# Altium PCB PCB1.PcbDoc (part 1 of 2)
Units mil, origin at the board's own origin, x right, y up, seen from the top; angles counter-clockwise.
Board outline 5600 x 3600 mil, 4 copper layers (Top Layer (GND), Layer 1 (Supplies), Layer 2 (GNDs), Bottom Layer (5VA)), stack 23.756 mil thick; 77 components, 77 nets, 439 pads, 79 vias.
Unrouted connection lines stored in the file: 2.
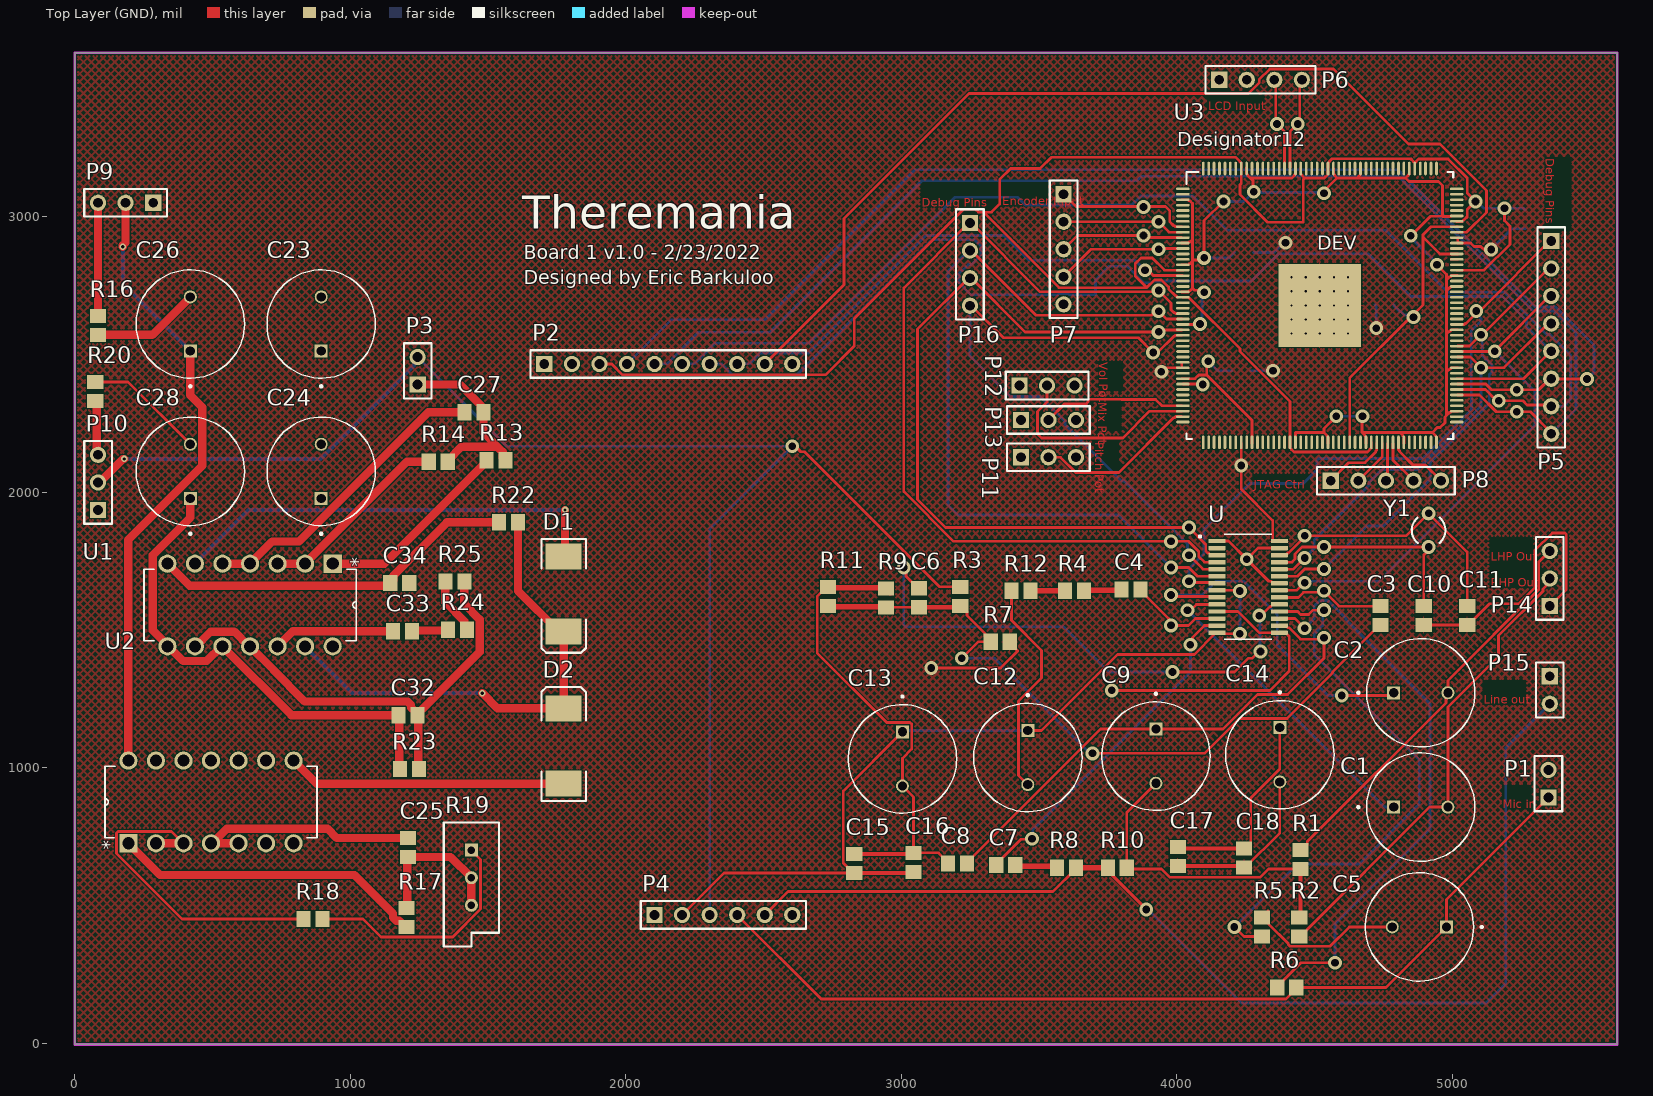
[diagram p0: Top Layer (GND) view]
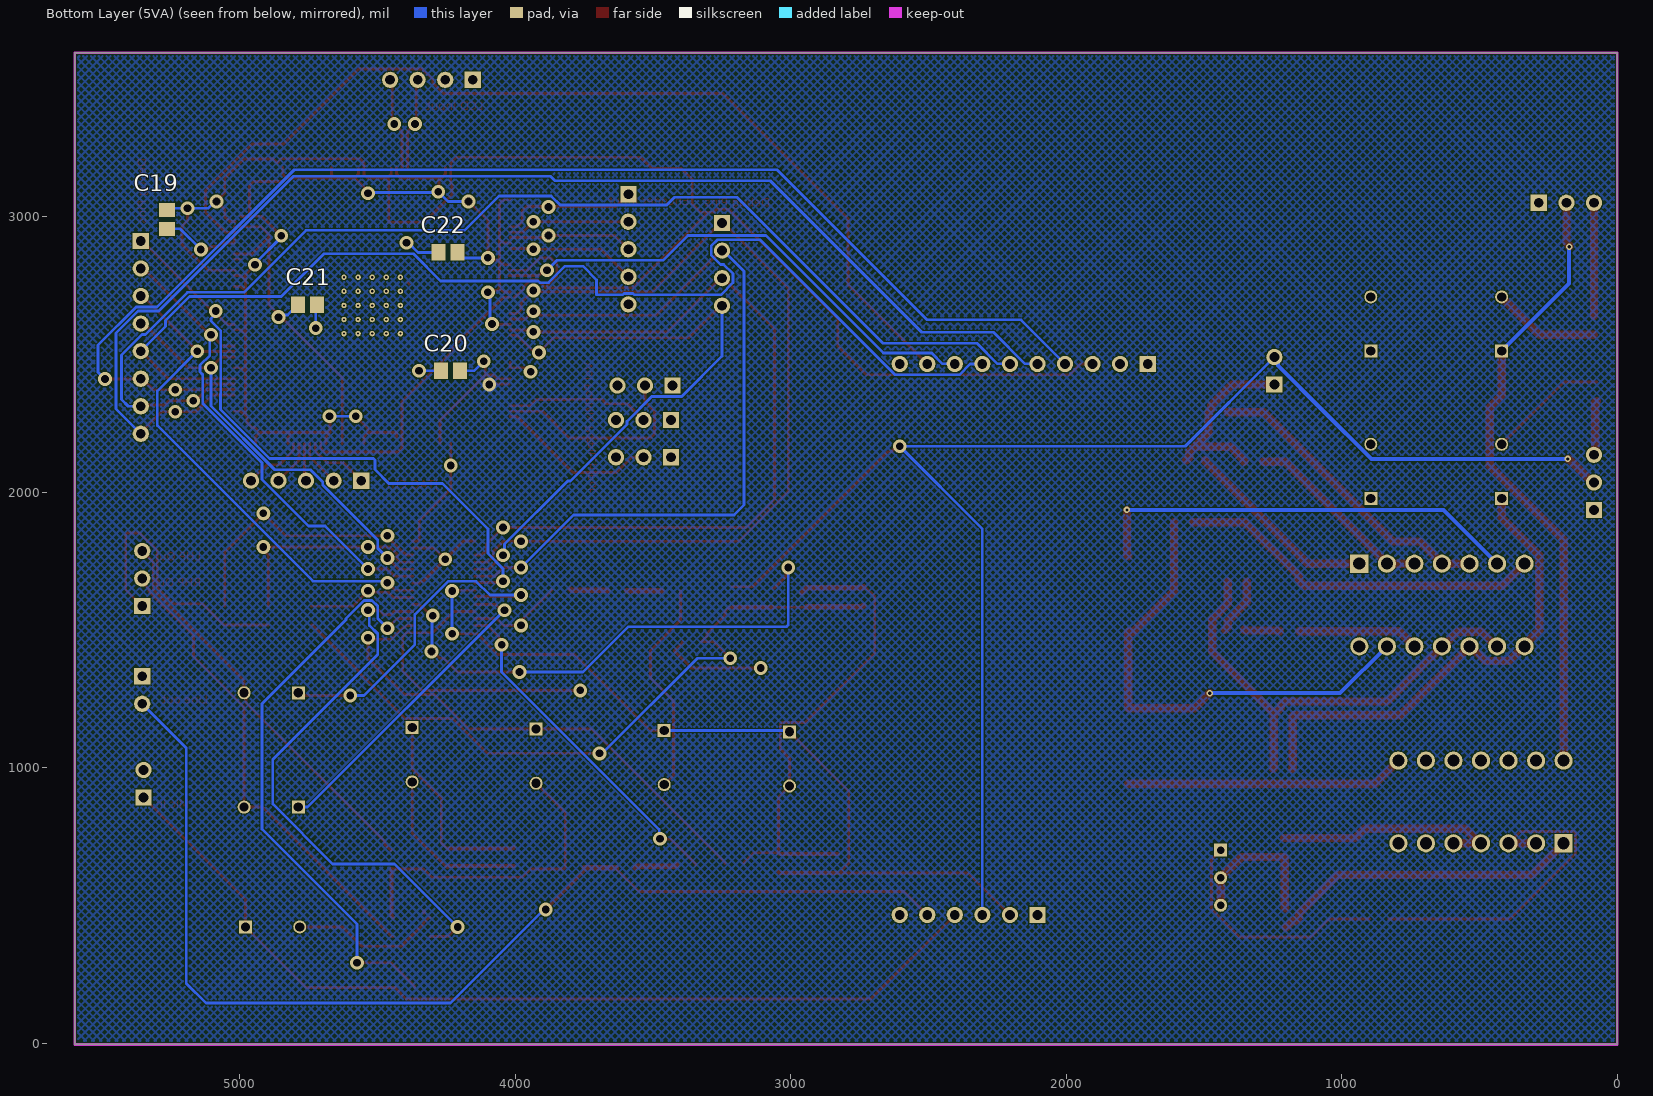
[diagram p1: Bottom Layer (5VA) view, seen from below]
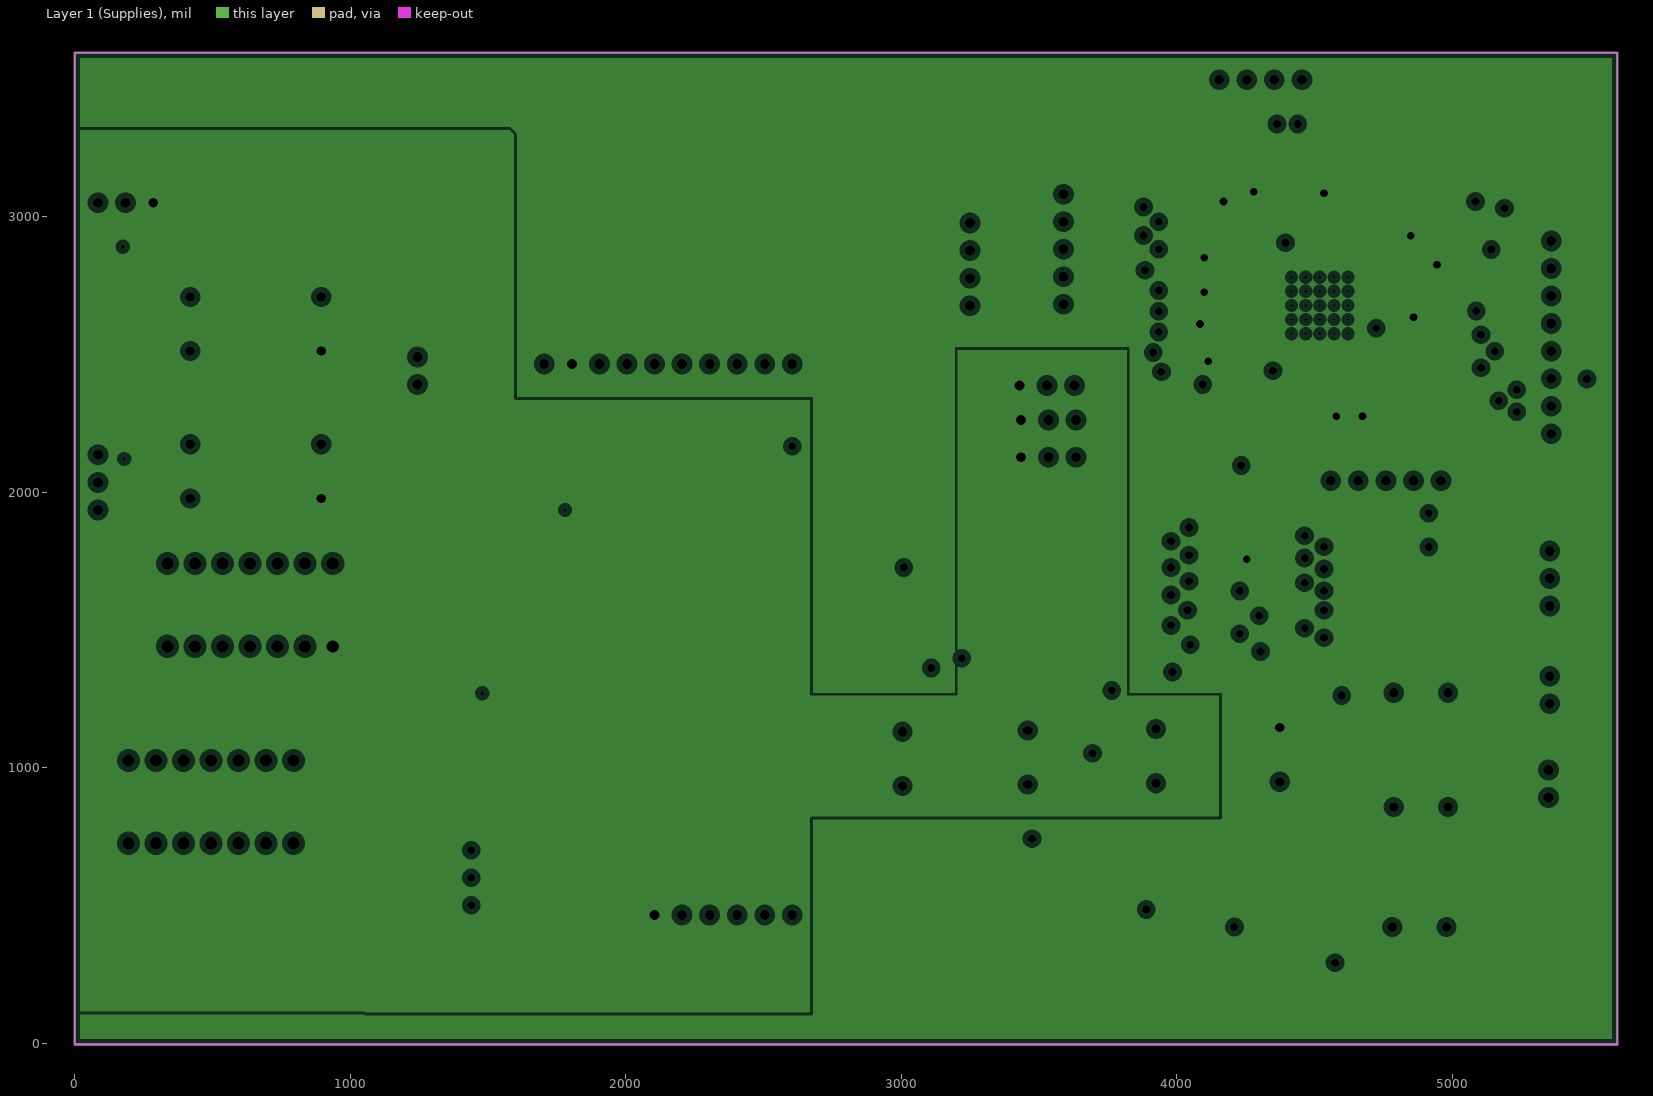
[diagram p2: Layer 1 (Supplies), clearances drawn from the general rule]
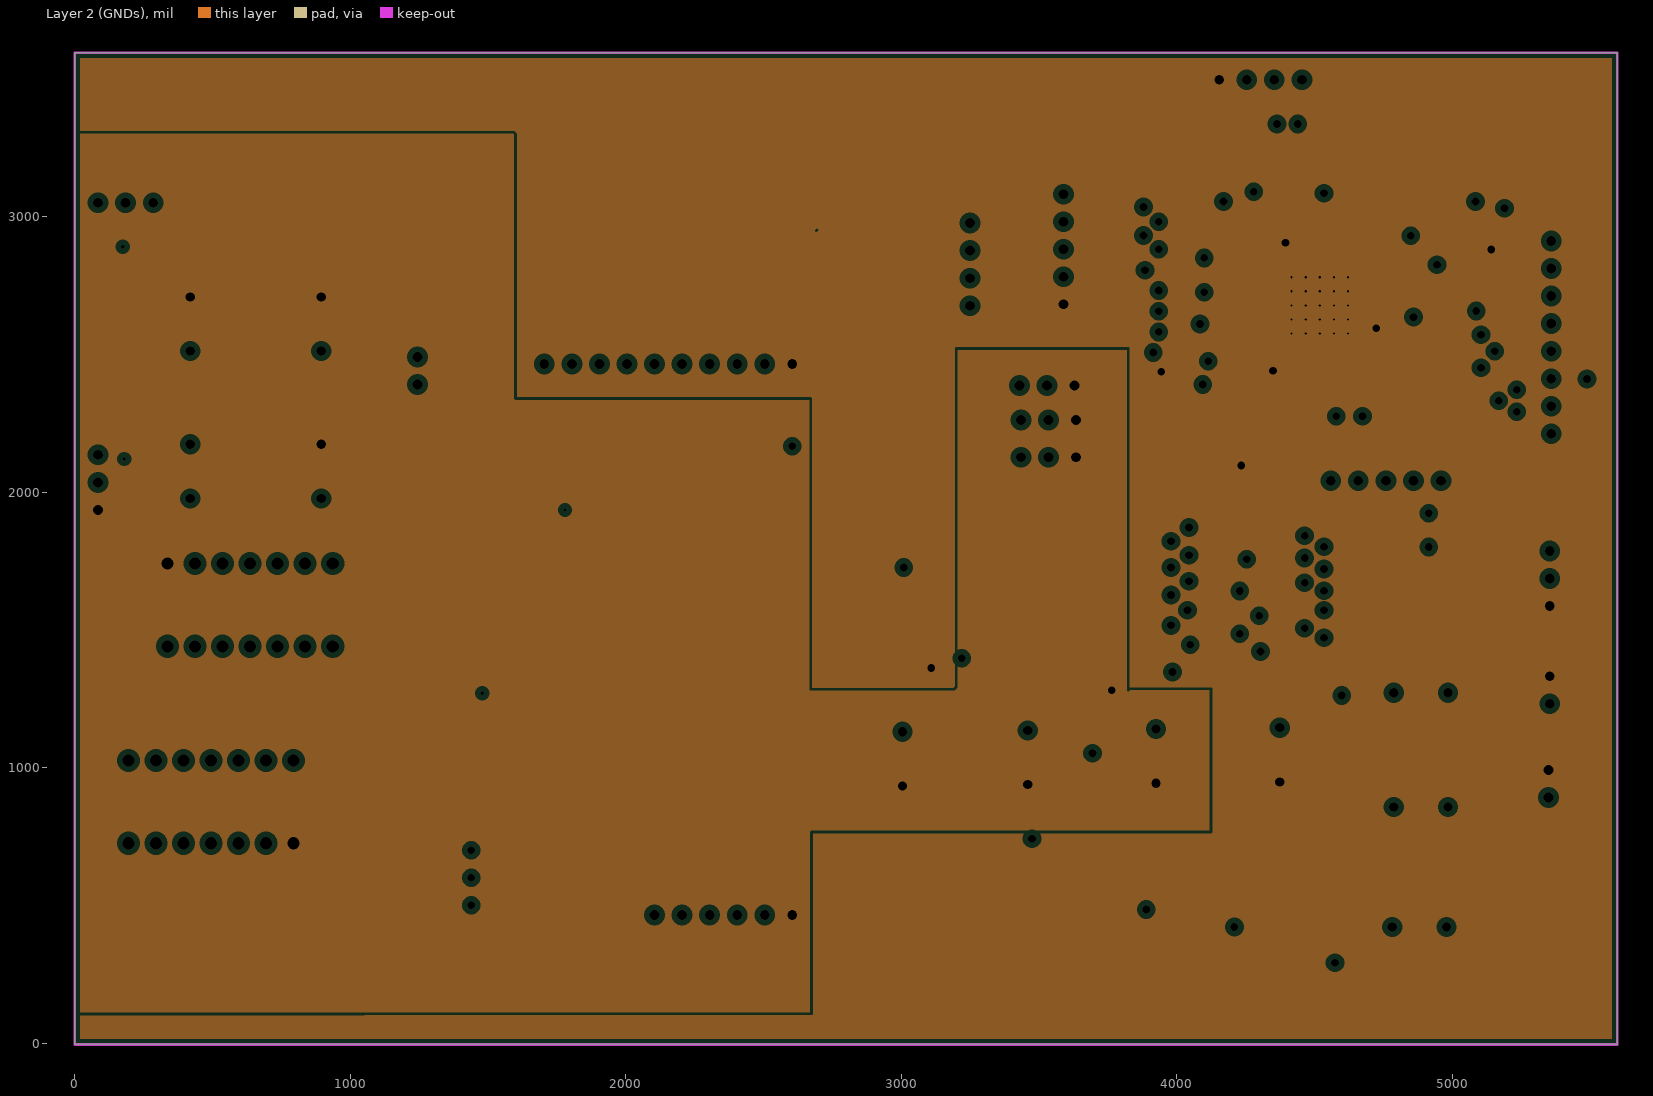
[diagram p3: Layer 2 (GNDs), clearances drawn from the general rule]

## Layer stack, top to bottom
Top Solder: solder mask 0.4, Solder Resist, Dk 3.5
Top Layer (GND): signal copper 1.4
Dielectric 2: prepreg 2.8, PP-006, Dk 4.1
Layer 1 (Supplies): plane copper 1.378, net (Multiple Nets)
Dielectric 1: dielectric 12.6, FR-4, Dk 4.8
Layer 2 (GNDs): plane copper 1.378, net (Multiple Nets)
Dielectric 3: prepreg 2.8, PP-006, Dk 4.1
Bottom Layer (5VA): signal copper 1.4
Bottom Solder: solder mask 0.4, Solder Resist, Dk 3.5

## Board outline
0,-5 0,3595 5600,3595 5600,-5

## Design rules (kind name [scope] priority, off if disabled: settings)
BoardOutlineClearance [All] p1: gap=7.87 ignorepadtopadclearanceinfootprint=FALSE
Clearance [All] p1 off: gap=4 ignorepadtopadclearanceinfootprint=TRUE except(5: Arc-Via Track-Via SMDPad-Via THPad-Via Via-Via Via-Fill Via-Poly Via-Region Via-Text; 9.84: Arc-Hole Track-Hole SMDPad-Hole THPad-Hole Via-Hole Fill-Hole Poly-Hole Region-Hole)
ComponentClearance [All] p1: gap=4 collisioncheckmode=3 verticalgap=4 showdistances=TRUE
DiffPairsRouting [All] p1: maxlimit=4 minlimit=4 mostfreqgap=4 toplayer_minwidth=4 toplayer_maxwidth=71497.94 toplayer_prefwidth=4 bottomlayer_minwidth=4 bottomlayer_maxwidth=71497.94 bottomlayer_prefwidth=4 maxuncoupledlength=4
Height [All] p1: minheight=0 maxheight=71497.94 prefheight=71497.94
HoleSize [All] p1: absolutevalues=TRUE maxlimit=248.03 minlimit=7.87 maxpercent=80.000 minpercent=20.000
HoleToHoleClearance [All] p1: gap=9.84 allowstackedmicrovias=TRUE
LayerPairs [All] p1: enforce=FALSE
MinimumAnnularRing [All] p1: minimumring=10
MinimumSolderMaskSliver [All] p1: minsoldermaskwidth=0
PlaneClearance [All] p1: clearance=20
PlaneConnect PlaneConnectPowerPads [InPadClass('PowerPads')] p1: planeconnectstyle=Direct reliefexpansion=20 reliefentries=4 reliefconductorwidth=10 reliefairgap=10
PlaneConnect [All] p2: pad.planeconnectstyle=Relief pad.reliefexpansion=11.81 pad.reliefentries=4 pad.reliefconductorwidth=4 pad.reliefairgap=4 via.planeconnectstyle=Direct via.reliefexpansion=11.81 via.reliefentries=4 via.reliefconductorwidth=5 via.reliefairgap=10
PolygonConnect PolygonConnectPowerPads [All vs (InPadClass('PowerPads'))] p1: connectstyle=Direct reliefconductorwidth=10 reliefentries=4 polygonreliefangle="90 Angle" airgapwidth=10
PolygonConnect [All] p2: thpad.connectstyle=Relief thpad.reliefconductorwidth=4 thpad.reliefentries=4 thpad.polygonreliefangle="90 Angle" thpad.airgapwidth=4 smdpad.connectstyle=Relief smdpad.reliefconductorwidth=4 smdpad.reliefentries=4 smdpad.polygonreliefangle="90 Angle" smdpad.airgapwidth=4 via.connectstyle=Direct via.reliefconductorwidth=5 via.reliefentries=4 via.polygonreliefangle="90 Angle" via.airgapwidth=10
RoutingVias [All] p1: holewidth=7.87 width=17.72 viastyle="Through Hole" minholewidth=7.87 minwidth=17.72 maxholewidth=248.03 maxwidth=50
SilkToSilkClearance [All] p1: silktosilkclearance=0
SilkToSolderMaskClearance [IsPad] p1: minsilkscreentomaskgap=4 clearancetoexposedcopper=TRUE
SolderMaskExpansion [All] p1: expansion=4 istentingtop=FALSE
Width [All] p1: maxlimit=71497.94 minlimit=4 preferedwidth=0
19 further rules are at their usual default settings.

## Classes and differential pairs
component class theremin: C23 C24 C25 C26 C27 C28 C32 C33 C34 D1 D2 P3 P9 P10 R13 R14 R16 R17 R18 R19 R20 R22 R23 R24 R25 U1 U2
component class DSP2: C19 C20 C21 C22 P7 P8 P11 P12 P13 U3
component class DSP1: P5 P6 P16
component class connectors: P2 P4
component class codec: C1 C2 C3 C4 C5 C6 C7 C8 C9 C10 C11 C12 C13 C14 C15 C16 C17 C18 P1 P14 P15 R1 R2 R3 R4 R5 R6 R7 R8 R9 R10 R11 R12 U Y1

## Components (designator, comment, footprint, x,y, rotation, side; value= is the part's Value field where it differs from the comment)
C1 "EEUFC1V221E" CAPPRD500W60D1000H1250 4886.42,856.38 r0 top value=220uF
C2 "EEUFC1V221E" CAPPRD500W60D1000H1250 4886.42,1271.38 r0 top value=220uF
C3 "Cap" CAPC0805 4739.84,1551.38 r90 top value=0.47uF
C4 "Cap" CAPC0805 3834.84,1646.38 r180 top value=0.47uF
C5 "EEUFC1V221E" CAPPRD500W60D1000H1250 4881.42,421.38 r180 top value=1uF
C6 "Cap" CAPC0805 3064.84,1616.38 r90 top value=0.47uF
C7 "Cap" CAPC0805 3379.84,646.38 r0 top value=0.47uF
C8 "Cap" CAPC0805 3204.84,651.38 r0 top value=0.1uF
C9 "EEUFC1V221E" CAPPRD500W60D1000H1250 3924.84,1041.38 r270 top value=10uF
C10 "Cap" CAPC0805 4897.34,1551.38 r270 top value=33pF
C11 "Cap" CAPC0805 5054.84,1551.38 r270 top value=36pF
C12 "EEUFC1V221E" CAPPRD500W60D1000H1250 3459.84,1036.38 r270 top value=10uF
C13 "EEUFC1V221E" CAPPRD500W60D1000H1250 3004.84,1031.38 r270 top value=10uF
C14 "EEUFC1V221E" CAPPRD500W60D1000H1250 4374.84,1046.38 r270 top value=10uF
C15 "Cap" CAPC0805 2829.84,651.38 r90 top value=0.1uF
C16 "Cap" CAPC0805 3044.84,655.83 r90 top value=0.1uF
C17 "Cap" CAPC0805 4004.84,676.38 r90 top value=0.1uF
C18 "Cap" CAPC0805 4244.84,671.38 r90 top value=0.1uF
C19 "Cap" CAPC0805 5265,2990 r90 bottom value=22uF
C20 "Cap" CAPC0805 4235,2440 r180 bottom value=2.2uF
C21 "Cap" CAPC0805 4755,2680 r0 bottom value=0.1uF
C22 "Cap" CAPC0805 4245,2870 r180 bottom value=0.1uF
C23 "EEUFC1V221E" CAPPRD500W60D1000H1250 895,2610 r90 top value=10uF
C24 "EEUFC1V221E" CAPPRD500W60D1000H1250 895,2075 r90 top value=10uF
C25 "Cap" CAPC0805 1210,710 r90 top value=100pF
C26 "EEUFC1V221E" CAPPRD500W60D1000H1250 420,2610 r90 top value=10uF
C27 "Cap" CAPC0805 1450,2290 r0 top value=100pF
C28 "EEUFC1V221E" CAPPRD500W60D1000H1250 420,2075 r90 top value=10uF
C32 "Cap" CAPC0805 1210,1190 r180 top value=0.01uF
C33 "Cap" CAPC0805 1190,1495 r0 top value=0.1uF
C34 "Cap" CAPC0805 1180,1670 r0 top value=0.01uF
D1 "Diode" SMC 1775,1630 r270 top
D2 "Diode" SMC 1775,1078.19 r90 top
P1 "Header 2" HDR1X2 5349.84,891.38 r90 top
P2 "Header 10" HDR1X10 1705,2465 r0 top
P3 "Header 2" HDR1X2 1245,2390 r90 top
P4 "Header 6" HDR1X6 2105,465 r0 top
P5 "Header 8" HDR1X8 5359.84,2911.38 r270 top
P6 "LCD I2C" HDR1X4 4154.84,3496.38 r0 top
P7 "Encoder Header" HDR1X5 3589.84,3081.38 r270 top
P8 "JTAG" HDR1X5 4559.84,2041.38 r0 top
P9 "Pitch Ctrl" HDR1X3 285,3050 r180 top
P10 "Volume Ctrl" HDR1X3 85,1935 r90 top
P11 "Pitch Ctrl" HDR1X3 3434.84,2126.38 r0 top
P12 "Volume Ctrl" HDR1X3 3429.84,2386.38 r0 top
P13 "Mix Ctrl" HDR1X3 3434.84,2261.38 r0 top
P14 "Phonejack3" HDR1X3 5354.84,1586.38 r90 top
P15 "Phonejack2" HDR1X2 5354.84,1331.38 r270 top
P16 "Header 4" HDR1X4 3249.84,2976.38 r270 top
R1 "Res3" RES0805 4449.84,666.38 r270 top value=47K
R2 "Res3" RES0805 4444.84,421.38 r90 top value=47K
R3 "Res3" RES0805 3214.84,1621.38 r270 top value=4.7K
R4 "Res3" RES0805 3629.84,1641.38 r180 top value=100
R5 "Res3" RES0805 4309.84,421.38 r270 top value=4.7K
R6 "Res3" RES0805 4399.84,201.38 r0 top value=2.2K
R7 "Res3" RES0805 3359.84,1456.38 r180 top value=4.7K
R8 "Res3" RES0805 3599.84,636.38 r0 top value=100
R9 "Res3" RES0805 2944.84,1615.83 r270 top value=4.7K
R10 "Res3" RES0805 3784.84,636.38 r180 top value=47K
R11 "Res3" RES0805 2734.84,1621.38 r270 top value=4.7K
R12 "Res3" RES0805 3434.84,1641.38 r0 top value=47K
R13 "Res3" RES0805 1530,2115 r0 top value=270K
R14 "Res3" RES0805 1320,2110 r0 top value=27K
R16 "Res3" RES0805 85,2605 r90 top value=27K
R17 "Res3" RES0805 1205,455 r270 top value=270K
R18 "Res3" RES0805 865,450 r180 top value=22K
R19 "Calibration" VR5 1440,600 r270 top value=10K
R20 "Res3" RES0805 75,2365 r270 top value=470
R22 "Res3" RES0805 1575,1890 r0 top value=27K
R23 "Res3" RES0805 1215,995 r180 top value=270K
R24 "Res3" RES0805 1390,1500 r0 top value=22K
R25 "Res3" RES0805 1380,1675 r0 top value=22K
U "TLV320AIC23BPW" SOP65P640X120-28N 4259.76,1655.94 r0 top
U1 "MC14069UBCPG" DIP254P762X469-14 336.73,1440 r270 top
U2 "MC14069UBCPG" DIP254P762X469-14 795,1025 r90 top
U3 "TMS320F28379DPTP" PTP0176F_L 4520,2677.36 r0 top value=Value
Y1 "XTAL" R38 4914.84,1861.38 r0 top

## Footprints (in the part's own frame and the unit in brackets; to place one, negate y for a bottom-side part, rotate by r counter-clockwise, add the part's x,y. Pads: shape width x height; smd on the part's side, far side on the other; paste and mask are expansions set on the pad)
CAPC0805 [mm] "Chip Capacitor, 2-Leads, Body 2.01x1.25mm, IPC Medium Density"
  rect 1.3x1.5 smd: 1(-0.875,0) 2(0.875,0)
  body extent -1.1,-0.72 1.11,0.72, height 1.8
CAPPRD500W60D1000H1250 [mm]
  round 1.2 hole 0.85: N(2.5,0)
  rect 1.2x1.2 hole 0.85: P(-2.5,0)
  silkscreen extent -5.85,-5 5,5, body extent -5,-5 5,5, height 12.5
DIP254P762X469-14 [mil]
  rect 66x66 hole 44: 1(-300,600)
  round 66 hole 44: 2(-300,500) 3(-300,400) 4(-300,300) 5(-300,200) 6(-300,100) 7(-300,0) 8(0,0) 9(0,100) 10(0,200) 11(0,300) 12(0,400) 13(0,500) 14(0,600)
  silkscreen extent -280,-85 -20,685, body extent -375,-220 375,220, height 210
HDR1X2 [mm] "Connector; Header; 2 Position"
  rect 1.5x1.5 hole 0.9: 1(0,0)
  round 1.5 hole 0.9: 2(2.54,0)
  silkscreen extent -1.27,-1.27 3.81,1.27
HDR1X3 [mm] "Connector; Header; 3 Position"
  rect 1.5x1.5 hole 0.9: 1(0,0)
  round 1.5 hole 0.9: 2(2.54,0) 3(5.08,0)
  silkscreen extent -1.27,-1.27 6.35,1.27
HDR1X4 [mm] "Connector; Header; 4 Position"
  rect 1.5x1.5 hole 0.9: 1(0,0)
  round 1.5 hole 0.9: 2(2.54,0) 3(5.08,0) 4(7.62,0)
  silkscreen extent -1.27,-1.27 8.89,1.27
HDR1X5 [mm] "Connector; Header; 5 Position"
  rect 1.5x1.5 hole 0.9: 1(0,0)
  round 1.5 hole 0.9: 2(2.54,0) 3(5.08,0) 4(7.62,0) 5(10.16,0)
  silkscreen extent -1.27,-1.27 11.43,1.27
HDR1X6 [mm] "Connector; Header; 6 Position"
  rect 1.5x1.5 hole 0.9: 1(0,0)
  round 1.5 hole 0.9: 2(2.54,0) 3(5.08,0) 4(7.62,0) 5(10.16,0) 6(12.7,0)
  silkscreen extent -1.27,-1.27 13.97,1.27
HDR1X8 [mm] "Connector; Header; 8 Position"
  rect 1.5x1.5 hole 0.9: 1(0,0)
  round 1.5 hole 0.9: 2(2.54,0) 3(5.08,0) 4(7.62,0) 5(10.16,0) 6(12.7,0) 7(15.24,0) 8(17.78,0)
  silkscreen extent -1.27,-1.27 19.05,1.27
HDR1X10 [mm] "Connector; Header; 10 Position"
  rect 1.5x1.5 hole 0.9: 1(0,0)
  round 1.5 hole 0.9: 2(2.54,0) 3(5.08,0) 4(7.62,0) 5(10.16,0) 6(12.7,0) 7(15.24,0) 8(17.78,0) 9(20.32,0) 10(22.86,0)
  silkscreen extent -1.27,-1.27 24.13,1.27
PTP0176F_L [mm]
  oval 1.25x0.25 smd paste+0 mask+0.051: 1(-12.625,10.75) 2(-12.625,10.25) 3(-12.625,9.75) 4(-12.625,9.25) 5(-12.625,8.75) 6(-12.625,8.25) 7(-12.625,7.75) 8(-12.625,7.25) 9(-12.625,6.75) 10(-12.625,6.25) 11(-12.625,5.75) 12(-12.625,5.25) 13(-12.625,4.75) 14(-12.625,4.25) 15(-12.625,3.75) 16(-12.625,3.25) 17(-12.625,2.75) 18(-12.625,2.25) 19(-12.625,1.75) 20(-12.625,1.25) 21(-12.625,0.75) 22(-12.625,0.25) 23(-12.625,-0.25) 24(-12.625,-0.75) 25(-12.625,-1.25) 26(-12.625,-1.75) 27(-12.625,-2.25) 28(-12.625,-2.75) 29(-12.625,-3.25) 30(-12.625,-3.75) 31(-12.625,-4.25) 32(-12.625,-4.75) 33(-12.625,-5.25) 34(-12.625,-5.75) 35(-12.625,-6.25) 36(-12.625,-6.75) 37(-12.625,-7.25) 38(-12.625,-7.75) 39(-12.625,-8.25) 40(-12.625,-8.75) 41(-12.625,-9.25) 42(-12.625,-9.75) 43(-12.625,-10.25) 44(-12.625,-10.75) 89(12.625,-10.75) 90(12.625,-10.25) 91(12.625,-9.75) 92(12.625,-9.25) 93(12.625,-8.75) 94(12.625,-8.25) 95(12.625,-7.75) 96(12.625,-7.25) 97(12.625,-6.75) 98(12.625,-6.25) 99(12.625,-5.75) 100(12.625,-5.25) 101(12.625,-4.75) 102(12.625,-4.25) 103(12.625,-3.75) 104(12.625,-3.25) 105(12.625,-2.75) 106(12.625,-2.25) 107(12.625,-1.75) 108(12.625,-1.25) 109(12.625,-0.75) 110(12.625,-0.25) 111(12.625,0.25) 112(12.625,0.75) 113(12.625,1.25) 114(12.625,1.75) 115(12.625,2.25) 116(12.625,2.75) 117(12.625,3.25) 118(12.625,3.75) 119(12.625,4.25) 120(12.625,4.75) 121(12.625,5.25) 122(12.625,5.75) 123(12.625,6.25) 124(12.625,6.75) 125(12.625,7.25) 126(12.625,7.75) 127(12.625,8.25) 128(12.625,8.75) 129(12.625,9.25) 130(12.625,9.75) 131(12.625,10.25) 132(12.625,10.75)
  oval 0.25x1.25 smd paste+0 mask+0.051: 45(-10.75,-12.625) 46(-10.25,-12.625) 47(-9.75,-12.625) 48(-9.25,-12.625) 49(-8.75,-12.625) 50(-8.25,-12.625) 51(-7.75,-12.625) 52(-7.25,-12.625) 53(-6.75,-12.625) 54(-6.25,-12.625) 55(-5.75,-12.625) 56(-5.25,-12.625) 57(-4.75,-12.625) 58(-4.25,-12.625) 59(-3.75,-12.625) 60(-3.25,-12.625) 61(-2.75,-12.625) 62(-2.25,-12.625) 63(-1.75,-12.625) 64(-1.25,-12.625) 65(-0.75,-12.625) 66(-0.25,-12.625) 67(0.25,-12.625) 68(0.75,-12.625) 69(1.25,-12.625) 70(1.75,-12.625) 71(2.25,-12.625) 72(2.75,-12.625) 73(3.25,-12.625) 74(3.75,-12.625) 75(4.25,-12.625) 76(4.75,-12.625) 77(5.25,-12.625) 78(5.75,-12.625) 79(6.25,-12.625) 80(6.75,-12.625) 81(7.25,-12.625) 82(7.75,-12.625) 83(8.25,-12.625) 84(8.75,-12.625) 85(9.25,-12.625) 86(9.75,-12.625) 87(10.25,-12.625) 88(10.75,-12.625) 133(10.75,12.625) 134(10.25,12.625) 135(9.75,12.625) 136(9.25,12.625) 137(8.75,12.625) 138(8.25,12.625) 139(7.75,12.625) 140(7.25,12.625) 141(6.75,12.625) 142(6.25,12.625) 143(5.75,12.625) 144(5.25,12.625) 145(4.75,12.625) 146(4.25,12.625) 147(3.75,12.625) 148(3.25,12.625) 149(2.75,12.625) 150(2.25,12.625) 151(1.75,12.625) 152(1.25,12.625) 153(0.75,12.625) 154(0.25,12.625) 155(-0.25,12.625) 156(-0.75,12.625) 157(-1.25,12.625) 158(-1.75,12.625) 159(-2.25,12.625) 160(-2.75,12.625) 161(-3.25,12.625) 162(-3.75,12.625) 163(-4.25,12.625) 164(-4.75,12.625) 165(-5.25,12.625) 166(-5.75,12.625) 167(-6.25,12.625) 168(-6.75,12.625) 169(-7.25,12.625) 170(-7.75,12.625) 171(-8.25,12.625) 172(-8.75,12.625) 173(-9.25,12.625) 174(-9.75,12.625) 175(-10.25,12.625) 176(-10.75,12.625)
  rect 7.62x7.62 smd paste-10.987 mask+0.051: 177(0,0)
  round 0.5 / inner round 1.524 / far side round 0.5 hole 0.203 mask+0.051: V(-2.6,-2.6) V(-2.6,-1.3) V(-2.6,0) V(-2.6,1.3) V(-2.6,2.6) V(-1.3,-2.6) V(-1.3,-1.3) V(-1.3,0) V(-1.3,1.3) V(-1.3,2.6) V(0,-2.6) V(0,-1.3) V(0,0) V(0,1.3) V(0,2.6) V(1.3,-2.6) V(1.3,-1.3) V(1.3,0) V(1.3,1.3) V(1.3,2.6) V(2.6,-2.6) V(2.6,-1.3) V(2.6,0) V(2.6,1.3) V(2.6,2.6)
  silkscreen extent -12.3,-12.3 12.3,12.3, body extent 0,0 0.25,0.25, height 0.25
R38 [mm] "Crystal, Thru-Hole; 2 Leads; Body 3.1 x 8.2 mm (Dia.xH)"
  round 1.3 hole 0.7: 1(0,1.55) 2(0,-1.55)
  silkscreen extent -1.55,-1.19 1.55,1.17
RES0805 [mm] "Chip Resistor, 2-Leads, Body 2.01x1.25mm, IPC Medium Density"
  rect 1.3x1.5 smd: 1(-0.875,0) 2(0.875,0)
  body extent -1.1,-0.72 1.11,0.72, height 1.8
SMC [mm] "DO-214-AB/SMC; 2 C-Bend Leads; Body 7.9 x 5.9 mm, inc. leads (LxW)"
  rect 2.4x3.3 smd: 1(-3.475,0) 2(3.475,0)
  silkscreen extent -5.08,-2.05 5.42,2.06
SOP65P640X120-28N [mm]
  rrect25% 1.57x0.41 smd: 1(-2.87,4.225) 2(-2.87,3.575) 3(-2.87,2.925) 4(-2.87,2.275) 5(-2.87,1.625) 6(-2.87,0.975) 7(-2.87,0.325) 8(-2.87,-0.325) 9(-2.87,-0.975) 10(-2.87,-1.625) 11(-2.87,-2.275) 12(-2.87,-2.925) 13(-2.87,-3.575) 14(-2.87,-4.225) 15(2.87,-4.225) 16(2.87,-3.575) 17(2.87,-2.925) 18(2.87,-2.275) 19(2.87,-1.625) 20(2.87,-0.975) 21(2.87,-0.325) 22(2.87,0.325) 23(2.87,0.975) 24(2.87,1.625) 25(2.87,2.275) 26(2.87,2.925) 27(2.87,3.575) 28(2.87,4.225)
  silkscreen extent -4.54,-4.85 2.2,4.85
VR5 [mm] "Thru-Hole; 3 Leads"
  rect 1.2x1.2 hole 0.7: 1(-2.54,0)
  round 1.2 hole 0.7: 2(0,0) 3(2.54,0)
  silkscreen extent -5.08,-2.54 6.35,2.54

## Part data
C1 C2 C5 C9 C12 C13 C14 C23 C24 C26 C28: "Aluminum Electrolytic Capacitors - Radial Leaded", Package="RADIAL-2 Panasonic", Availability="In Stock", Check_prices=https://www.snapeda.com/parts/EEU-FC1V221E/Panasonic/view-part/6222388/?ref=eda, MF=Panasonic, MP=EEU-FC1V221E, Price=None, Purchase-URL=https://pricing.snapeda.com/search/part/EEU-FC1V221E/?ref=eda, SnapEDA_Link=https://www.snapeda.com/parts/EEU-FC1V221E/Panasonic/view-part/6222388/?ref=snap
C3 C4 C6 C7 C8 C10 C11 C15 C16 C17 C18 C19 C20 C21 C22 C25 C27 C32 C33 C34: "Capacitor", LatestRevisionDate=17-Jul-2002, LatestRevisionNote="Re-released for DXP Platform.", PackageDescription="Radial Cap, Thru-Hole; 2 Leads; 0.3 in Pin Spacing", PackageReference=RAD-0.3, Published=8-Jun-2000, Publisher="Altium Limited"
D1 D2: "Default Diode", Code_JEDEC=DO-214-AB, LatestRevisionDate=17-Jul-2002, LatestRevisionNote="Re-released for DXP Platform.", PackageDescription="DO-214-AB/SMC; 2 C-Bend Leads; Body 7.9 x 5.9 mm, inc. leads (LxW)", PackageReference=SMC, PackageVersion=Sep-1996, Published=8-Jun-2000, Publisher="Altium Limited"
P1 P3: "Header, 2-Pin", LatestRevisionDate=17-Jul-2002, LatestRevisionNote="Re-released for DXP Platform.", Publisher="Altium Limited"
P2: "Header, 10-Pin", LatestRevisionDate=17-Jul-2002, LatestRevisionNote="Re-released for DXP Platform.", Publisher="Altium Limited"
P4: "Header, 6-Pin", LatestRevisionDate=17-Jul-2002, LatestRevisionNote="Re-released for DXP Platform.", Publisher="Altium Limited"
P5: "Header, 8-Pin", LatestRevisionDate=17-Jul-2002, LatestRevisionNote="Re-released for DXP Platform.", Publisher="Altium Limited"
P6: library part "Header 4", "Header, 4-Pin", LatestRevisionDate=17-Jul-2002, LatestRevisionNote="Re-released for DXP Platform.", Publisher="Altium Limited"
P7 P8: library part "Header 5", "Header, 5-Pin", LatestRevisionDate=17-Jul-2002, LatestRevisionNote="Re-released for DXP Platform.", Publisher="Altium Limited"
P9 P10 P11 P12 P13 P14: library part "Header 3", "Header, 3-Pin", LatestRevisionDate=17-Jul-2002, LatestRevisionNote="Re-released for DXP Platform.", Publisher="Altium Limited"
P15: library part "Header 2", "Header, 2-Pin", LatestRevisionDate=17-Jul-2002, LatestRevisionNote="Re-released for DXP Platform.", Publisher="Altium Limited"
P16: "Header, 4-Pin", LatestRevisionDate=17-Jul-2002, LatestRevisionNote="Re-released for DXP Platform.", Publisher="Altium Limited"
R1 R2 R3 R4 R5 R6 R7 R8 R9 R10 R11 R12 R13 R14 R16 R17 R18 R20 R22 R23 R24 R25: "Resistor", LatestRevisionDate=29-May-2009, LatestRevisionNote="IPC-7351 Footprint Added.", PackageDescription="Chip Resistor", PackageReference=J1-0603, Published=8-Jun-2000, Publisher="Altium Limited"
R19: library part RPot, "Potentiometer", LatestRevisionDate=17-Jul-2002, LatestRevisionNote="Re-released for DXP Platform.", PackageDescription="Variable Resistor, Thru-Hole; 3 Leads", PackageReference=VR5, Published=8-Jun-2000, Publisher="Altium Limited", Set Position=0.5, Sim Note="Enter the Resistance value and the set point into parameter fields."
U: "Low-Power Stereo CODEC with HP Amplifier 28-TSSOP -10 to 70", Package="TSSOP-28 Texas Instruments", Arrow_Electronics-Purchase-URL=https://snapeda.com/shop?store=Arrow+Electronics&id=249064, Availability=Warning, DigiKey-Purchase-URL=https://snapeda.com/shop?store=DigiKey&id=249064, MF="Texas Instruments", Mouser-Purchase-URL=https://snapeda.com/shop?store=Mouser&id=249064, MP=TLV320AIC23BPW, Price=None, SnapEDA_Link=https://www.snapeda.com/parts/TLV320AIC23BPW/Texas%20Instruments/view-part/249064/?ref=snap, Texas_Instruments-Purchase-URL=https://snapeda.com/shop?store=Texas+Instruments&id=249064
U1 U2: "Inverter IC 6 Channel - 14-PDIP", Package="DIP-14 Motorola", Availability="In Stock", Check_prices=https://www.snapeda.com/parts/MC14069UBCPG/Onsemi/view-part/?ref=eda, MF="ON Semiconductor", MP=MC14069UBCPG, Price=None, SnapEDA_Link=https://www.snapeda.com/parts/MC14069UBCPG/Onsemi/view-part/?ref=snap
U3: "Imported", Manufacturer="Texas Instruments", PartNumber=TMS320F28379DPTPS, RefDes=RefDes, TYPE=TYPE
Y1: "Crystal Oscillator", LatestRevisionDate=17-Jul-2002, LatestRevisionNote="Re-released for DXP Platform.", PackageDescription="Crystal, Thru-Hole; 2 Leads; Body 3.1 x 8.2 mm (Dia.xH)", PackageReference=R38, Published=8-Jun-2000, Publisher="Altium Limited"

## Via types
v1: diameter 50, hole 28, Top Layer (GND) to Bottom Layer (5VA), 75 vias
v2: diameter 23.62, hole 11.81, Top Layer (GND) to Bottom Layer (5VA), 4 vias

## Nets (pads, with @x,y where several pads share a name; then routed paths per layer and width w, separated by ;. In a path a pad name is that pad's centre, name@x,y a point inside that pad or via, vN(x,y) a via of type N, cw(c..) or ccw(c..) an arc to the next point about the centre after c; other vN are vias at no path point)
1.2VD: C19.2 P2.3 U3.16 U3.21 U3.61 U3.76 U3.117 U3.126 U3.137 U3.153 U3.158 U3.169 | length 7067.2
  Top Layer (GND) w10: P2.3 1905.43,2464.57 1949.53,2464.57 1988.63,2425.47 2725.47,2425.47 2830,2530 2830,2629.73 3226.65,3026.38 3270,3026.38 3280.47,3015.91 3299.41,3015.91 ; U3.21@4003.43,2706.89 3998.66,2711.65 3997.09,2711.65 3971.4,2737.34 3971.4,2744.32 3945.72,2770 3920,2770 3891.85,2741.85 ; U3.21 4023.03,2706.81 4044.13,2706.81 4230.28,2520.67 4230.28,2510.23 4411.73,2328.77 U3.61 4411.73,2160.79 4416.5,2156.02 4416.5,2154.45 4425.95,2145 4692.79,2145 4702.24,2154.45 4702.24,2156.02 4707.01,2160.79 U3.76 ; U3.16 3956.52,2805.31 3911.83,2850 3870.86,2850 3850,2829.14 3850,2783.7 3891.85,2741.85 ; U3.158 4451.1,3154.88 4455.87,3150.12 4455.87,3148.54 4464.61,3139.8 ; U3.117 5116.04,2805.31 5210,2899.27 5210,2965 5190,2985 v1(5190,3030) ; U3.126 5036.57,2982.48 5041.34,2987.24 5042.91,2987.24 5055,2999.33 5055,3025 v1(5085,3055) 5055,3085 5055,3140 4985.98,3209.02 4877.99,3209.02 4869.25,3200.27 4869.25,3198.7 4864.49,3193.94 4859.72,3198.7 4859.72,3200.27 4850,3210 4564.02,3210 4554.29,3200.27 4554.29,3198.7 4549.53,3193.94 U3.153 4549.45,3174.33 4549.45,3153.23 4536.02,3139.8 4464.61,3139.8 ; 3299.41,3015.91 3328.89,3015.91 3357.88,3044.9 3357.88,3134.7 3398.02,3174.85 3504.85,3174.85 3545,3215 4215.08,3215 4229.8,3200.27 4229.8,3198.7 4234.57,3193.94 U3.169 4234.57,3119.72 4230,3115.16 4230,3080 4330.55,2979.45 4460,2979.45 4460,3135.2 4464.61,3139.8 ; 3299.41,3015.91 3573.47,2741.85 3891.85,2741.85
  Bottom Layer (5VA) w10: v1(5085,3055) 5091.57,3055 5116.57,3030 v1(5190,3030) 5259.45,3030 C19.2
1AIN: R13.1 U1.1 | length 716.5
  Top Layer (GND) w30: U1.1 1124.49,1740 1495.55,2111.06 R13.1
1BIN: R14.1 U1.2 U1.3 | length 702.1
  Top Layer (GND) w30: U1.3 U1.2 1206.73,2110 R14.1
1CIN: C27.1 U1.4 U1.5 | length 1106.6
  Top Layer (GND) w30: U1.5 U1.4 717,1820.28 814.23,1820.28 1283.95,2290 C27.1
1COUT: D1.1 U1.6 | length 1594.3
  Top Layer (GND) w30: D1.1 1780,1771.81 v2(1780,1935)
  Bottom Layer (5VA) w15: U1.6 631.73,1935 v2(1780,1935)
1DEIN: C32.1 R23.1 R25.2 U1.9 U1.11 | length 1759.3
  Top Layer (GND) w30: U1.9 441.03,1440 494.03,1493 579.42,1493 632.42,1440 U1.11 721.81,1354.92 721.81,1353.19 835,1240 1208.95,1240 1221.14,1227.81 1221.14,1217.24 C32.1@1244.45,1193.94 ; R23.1 1246.95,997.5 1246.95,1187.5 C32.1 C32.1@1244.45,1193.94 ; R25.2 1414.45,1593.4 1470.04,1537.81 1470.04,1419.53 C32.1@1244.45,1193.94
1DEOUT: C28.P C32.2 R23.2 U1.8 U1.10 | length 1798.3
  Top Layer (GND) w30: C28.P 420,1907.95 283.73,1771.68 283.73,1497.31 336.73,1444.31 U1.8 341.03,1440 394.03,1387 479.42,1387 532.42,1440 U1.10 786.73,1190 C32.2 1178.05,1187.5 1178.05,997.5 R23.2
1FIN: D1.2 D2.2 R22.2 U1.13 | length 1785.4
  Top Layer (GND) w30: v2(1480,1270) 1535,1215 D2.2 D1.2 1757.28,1493.19 1609.45,1641.02 R22.2
  Bottom Layer (5VA) w15: U1.13 1006.73,1270 v2(1480,1270)
1FOUT: C33.1 U1.12 | length 441.6
  Top Layer (GND) w30: U1.12 737.03,1440 792.03,1495 C33.1
2AIN: R17.2 U2.1 | length 1144.6
  Top Layer (GND) w30: U2.1 310,610 1015.55,610 1155.47,470.08 1155.47,455.57 1167.19,443.86 1177.76,443.86 1201.06,420.55 R17.2
2BIN: R18.2 U2.2 U2.3 | length 1214.6
  Top Layer (GND) w10: U2.3 352,768 157.86,768 152,762.14 152,687.86 389.86,450 R18.2
  Top Layer (GND) w30: U2.2 U2.3
2CIN: C25.2 U2.4 U2.5 | length 846.5
  Top Layer (GND) w30: U2.4 U2.4@499.31,725 ; U2.5 U2.4@499.31,725 ; C25.2 951.04,744.45 917.48,778 552.31,778 U2.4@499.31,725
2COUT: D2.1 U2.8 | length 1014.6
  Top Layer (GND) w30: U2.8 878.62,941.38 D2.1
3.3VA: C12.P C13.P C15.1 C16.1 P4.2 U.8 U.14 | length 3137.4
  Top Layer (GND) w10: P4.2@2185,465 P4.2@2190,465 ; P4.2 2356.93,616.93 C15.1@2825.91,616.93 ; C15.1 C15.1@2825.91,616.93 ; C13.P 2790.31,915.28 2790.31,652.52 C15.1@2825.91,616.93 ; C12.P 3509.8,1134.8 3785.61,1410.61 4064.6,1410.61 4139.94,1485.94 v1(4229.76,1485.94) ; U.8 4227.56,1643.15 v1(4229.76,1640.94)
  Top Layer (GND) w15: C15.1 3040.39,616.93 C16.1
  Bottom Layer (5VA) w10: C13.P 3009.84,1134.8 C12.P ; v1(4229.76,1485.94) v1(4229.76,1640.94)
5VA: C23.P C24.P P4.1 P9.1 P11.1 P12.1 P13.1 U1.14
5VD: P2.1 P6.2 U3.37 | length 72.8
  Top Layer (GND) w10: U3.37 U3.37 4093.15,2391.85 v1(4095,2390)
AGND: C8.1 C9.N C12.N C13.N C15.2 C16.2 C23.N C24.N C26.N C34.1 P4.6 P10.1 P11.3 P12.3 P13.3 R1.2 R2.2 R9.1 R10.1 R11.1 R12.1 R16.1 R22.1 U1.7 U2.7 U.11 U.15 | length 6620.5
  Top Layer (GND) w10: R11.1 2730.91,1655.83 2695.31,1620.24 2695.31,1415.91 2947.79,1163.43 3032.61,1163.43 3038.46,1157.57 3038.46,1067.11 3004.84,1033.49 C13.N 3044.84,892.95 C16.2 3135.44,690.27 3170.39,655.32 C8.1 ; R12.1 3400.39,1534.52 3509.84,1425.07 3509.84,1325.14 3426.22,1241.51 3426.22,971.57 C12.N ; v1(3765,1280) 4339.02,1280 4408.66,1349.64 4408.66,1476.54 4395.59,1489.61 U.15 4299.69,1489.61 4222.91,1566.38 U.11 ; C9.N 3819.29,837.4 R10.1 3823.74,631.93 3945.58,631.93 3976.17,601.34 4302.95,601.34 4333.54,631.93 R1.2
  Top Layer (GND) w15: C15.2 3040.39,685.83 C16.2 ; R2.2 4449.84,460.83 R1.2
  Top Layer (GND) w20: R11.1 2737.62,1653.05 2942.07,1653.05 R9.1 R9.1@2960.43,1634.69
  Top Layer (GND) w30: R16.1 282.13,2570.55 C26.N ; U1.7 416.73,1660 1135.55,1660 C34.1 ; C34.1@1145.55,1666.06 C34.1 ; R22.1 1351.05,1890 1156.14,1695.1 1156.14,1680.59 C34.1
ANT: C27.2 P3.1 R13.2 R14.2 | length 697.4
  Top Layer (GND) w30: P3.1 1398.95,2390 1473.86,2315.1 1473.86,2300.59 C27.2 1484.45,2215.47 1553.86,2146.06 1553.86,2125.59 R13.2 ; R14.2 1354.45,2113.94 1405.04,2164.53 1529.43,2164.53
CS: P2.7 P5.5 U3.97 | length 4244.2
  Top Layer (GND) w10: U3.97 5260.08,2411.61 P5.5
  Bottom Layer (5VA) w10: P2.7 2305.43,2464.57 2349.53,2464.57 2388.63,2425.47 2621.37,2425.47 3111.81,2915.91 3266.22,2915.91 3289.37,2892.75 3289.37,2860.01 3255.74,2826.38 3243.94,2826.38 3210.31,2792.75 3210.31,2760.01 3254.41,2715.91 3568.47,2715.91 3573.47,2720.91 3606.22,2720.91 3611.22,2715.91 3705.24,2715.91 3705.24,2770.24 3755,2820 3820,2820 3880,2760 3911.48,2760 3917.86,2766.38 4271.38,2766.38 4370,2865 4695,2865 4850,2710 5182.57,2710 5270.23,2622.35 5270.23,2600.99 P5.5
ENC0: P7.1 U3.8 | length 502.2
  Top Layer (GND) w10: P7.1 3634.84,3036.38 3878.46,3036.38 v1(3879.84,3035) ; v1@3879.84,3036.38 3959.84,3036.38 3974.84,3021.38 3974.84,2981.52 3989.79,2966.57 3992.11,2966.57 3995.89,2962.8 U3.8@4019.02,2962.8
ENC1: P7.2 U3.9 | length 445
  Top Layer (GND) w10: P7.2 v1(3934.84,2981.38) 3972.76,2943.46 4018.67,2943.46 U3.9@4019.02,2943.11
ENC2: P7.3 U3.10 | length 453.2
  Top Layer (GND) w10: P7.3 3639.84,2931.38 v1(3879.84,2931.38) 3887.45,2923.77 4018.67,2923.77 U3.10@4019.02,2923.43
ENC3: P7.4 U3.12 | length 471.7
  Top Layer (GND) w10: P7.4 3689.84,2881.38 v1(3934.84,2881.38) 3937.17,2883.71 4018.67,2883.71 U3.12@4019.02,2884.06
GND: C10.2 C11.2 C14.N C17.1 C18.1 C19.1 C20.1 C21.1 C22.1 P1.2 P2.10 P6.1 P7.5 P14.1 P15.1 R7.1 U3.33 U3.34 U3.52 U3.122 U3.123 U3.177 U3.V U.28 | length 3151.2
  Top Layer (GND) w10: v1(3109.84,1361.38) 3361.48,1361.38 3423.42,1423.32 3394.29,1452.44 R7.1 ; v1(3944.84,2436.38) 3945.67,2436.38 3960.27,2450.98 4019.02,2450.98 U3.33@4019.02,2470.67 ; U3.52@4234.57,2176.38 4234.7,2176.24 4234.7,2096.52 v1(4234.84,2096.38) 4234.84,2011.46 4348.87,1897.43 4348.87,1825.35 4351.94,1822.28 U.28 ; C18.1 4248.78,636.93 4374.84,762.99 C14.N ; U3.V@4517.64,2675 U3.177 U3.V@4521.28,2676.09 ; C10.2 C11.2 5058.78,1516.93 5136.73,1594.88 5242.48,1594.88 5299.84,1652.24 5299.84,1787.28 5363.94,1851.38 5408.98,1851.38 5414.84,1845.52 5414.84,1646.38 P14.1 ; U3.123@5020.98,2923.43 5020.98,2903.74 5067.48,2903.74 5079.84,2891.38 5103.98,2891.38 5122.77,2872.59 5132.16,2881.98 5133.55,2880.6 v1(5141.83,2880.6)
  Top Layer (GND) w15: C17.1 C18.1@4244.84,641.93
  Bottom Layer (5VA) w10: C20.1 v1(4350,2440) ; C22.1 4353.79,2870 4388.79,2905 v1(4395,2905) ; C21.1 4725,2675.55 v1(4725,2595) ; v1(5141.83,2880.6) 5216.78,2955.55 C19.1
GO: P2.8 U3.17 | length 1871.1
  Top Layer (GND) w10: v1(3885,2805) 3895.82,2805 3915.19,2785.63 U3.17
  Bottom Layer (5VA) w10: P2.8 2405.43,2465.43 2449.53,2465.43 2488.63,2504.53 2664.53,2504.53 3090.91,2930.91 3374.09,2930.91 3463.15,2841.85 3848.15,2841.85 v1(3885,2805)
LeftHP_Out: C2.N P14.3 R1.1 | length 1462.7
  Top Layer (GND) w10: R1.1 4453.78,700.83 4474.37,721.42 4474.37,730.83 4977.72,1234.17 4977.72,1264.25 C2.N 4984.84,1316.02 5314.84,1646.02 5314.84,1746.38 P14.3
LINE_OUT: P4.5 P15.2 R8.2 R10.2 | length 4089
  Top Layer (GND) w10: P4.5 2590,550 3551.85,550 3634.29,632.44 R8.2 ; R10.2 3744.84,630.83 3890,485.67 v1(3890,485)
  Top Layer (GND) w20: R8.2 R10.2
  Bottom Layer (5VA) w10: v1(3890,485) 3896.22,485 4236.22,145 5123.46,145 5194.84,216.38 5194.84,1071.38 P15.2
MCLKR/XB3: P16.3 U3.27 U.3 | length 2927.1
  Top Layer (GND) w10: U3.27@4019.02,2588.78 4018.67,2588.43 3941.9,2588.43 v1(3934.84,2581.38) 3449.84,2581.38 3249.84,2781.38 3059.84,2591.38 3059.84,1972.59 3161.49,1870.94 v1(4044.76,1870.94) 4105.87,1809.84 4105.87,1785.66 4112.91,1778.62 4116.42,1778.62 4123.94,1771.1 U.3
MDRB: P16.2 U3.25 U.6 | length 2931.9
  Top Layer (GND) w10: P16.2@3249.84,2881.38 3489.37,2641.85 3909.49,2641.85 3924.02,2656.38 v1(3934.84,2656.38) 3934.95,2656.38 3963.18,2628.15 U3.25@4019.02,2628.15 ; v1(3979.76,1725.94) 4044.26,1725.94 4075.88,1694.33 U.6
  Bottom Layer (5VA) w10: P16.2@3249.84,2881.38 3169.84,2801.38 3169.84,1952.59 3206.06,1916.38 3789.33,1916.38 v1(3979.76,1725.94)
MDXB: P16.1 U3.24 U.4 | length 3259
  Top Layer (GND) w10: U3.24@4019.02,2647.83 3995.89,2647.83 3992.11,2651.61 3989.79,2651.61 3979.84,2661.56 3979.84,2686.38 v1(3934.84,2731.38) 3930.31,2726.85 3504.37,2726.85 3249.84,2981.38 3009.84,2741.38 3009.84,2001.38 3190.28,1820.94 v1(3979.76,1820.94) 4044.26,1820.94 4080.06,1785.14 4080.06,1766.31 4100.87,1745.51 U.4
MFSRB: P5.1 U3.107 U.7 | length 2340.5
  Top Layer (GND) w10: v1(4044.76,1675.94) 4048.9,1671.81 4143.7,1671.81 U.7 ; U3.107@5020.98,2608.46 5044.11,2608.46 5047.89,2612.24 5050.71,2612.24 v1@5091.98,2653.52 ; v1(5088,2657.5) v1@5091.98,2653.52 ; P5.1@5359.84,2916.38 5109.84,2666.38 5104.84,2666.38 v1@5091.98,2653.52
  Bottom Layer (5VA) w10: v1(4044.76,1675.94) 4044.76,1721.45 4099.84,1776.53 4099.84,1866.38 4264.84,2031.38 4459.84,2031.38 4509.84,2081.38 4509.84,2115.52 4515.7,2121.38 4892.77,2121.38 5070.7,2299.31 5070.7,2356.13 5069.84,2356.98 5069.84,2585.88 5104.84,2620.88 5104.84,2629.84 5088,2646.68 v1(5088,2657.5)
MFSXB: P16.4 U3.28 U.5 | length 2300.2
  Top Layer (GND) w10: P16.4@3249.84,2681.38 3371.22,2560 3861.22,2560 v1(3914.84,2506.38) 3930.85,2506.38 3989.79,2565.32 3992.11,2565.32 3995.89,2569.09 U3.28@4019.02,2569.09 ; v1(4044.76,1770.94) 4095.79,1719.92 U.5
  Bottom Layer (5VA) w10: P16.4@3249.84,2681.38 3249.84,2493.18 3396.17,2346.85 3505.27,2346.85 3595.31,2256.81 3595.31,2245.01 3800.1,2040.22 3809.98,2040.22 4039.26,1810.94 4039.26,1776.45 v1(4044.76,1770.94)
Mic_In: C5.P P1.1 P4.4 R6.2 | length 3435.6
  Top Layer (GND) w10: P4.4@2385,465 P4.4@2385.43,464.57 ; P4.4 2710,160 4396.85,160 4434.29,197.44 R6.2 4759.84,201.38 C5.P 4979.84,521.38 P1.1
MISO: P2.6 P5.7 U3.95 | length 4343.9
  Top Layer (GND) w10: U3.95@5020.98,2372.24 5120.93,2372.24 5161.8,2331.38 v1(5169.84,2331.38) 5257.44,2331.38 5272.44,2316.38 P5.7@5359.84,2316.38
  Bottom Layer (5VA) w10: P2.6 2205.43,2465.43 2249.53,2465.43 2324.1,2540 2665,2540 3195,3070 3422.68,3070 3450.83,3041.85 3837.2,3041.85 3870.35,3075 4060,3075 4185,2950 4760,2950 4985,2725 5190.32,2725 5343.47,2571.85 5355.27,2571.85 5430,2497.12 5430,2335.86 5405.52,2311.38 P5.7
Mix: P13.2 U3.41 | length 527.4
  Top Layer (GND) w10: P13.2 3594.02,2320.55 3672.6,2320.55 3678.46,2326.41 3678.46,2330.52 3684.43,2336.5 3801.03,2336.5 3801.14,2336.38 3923.96,2336.38 3947.15,2313.19 U3.41@4019.02,2313.19
MOSI: P2.5 P5.8 U3.94 | length 4661.4
  Top Layer (GND) w10: U3.94@5020.98,2352.56 5099.16,2352.56 5160.35,2291.38 v1(5234.84,2291.38) 5284.84,2291.38 P5.8@5359.84,2216.38
  Bottom Layer (5VA) w10: P2.5 2105.43,2465.43 2149.53,2465.43 2264.1,2580 2525,2580 3075,3130 3856.48,3130 3872.86,3146.38 4805.35,3146.38 5294.87,2656.85 5370.27,2656.85 5450,2577.12 5450,2301.54 P5.8
NetC1_P: C1.P U.10 | length 1159.9
  Top Layer (GND) w10: v1(4039.76,1570.94) 4050.59,1570.94 4071.61,1591.97 U.10
  Bottom Layer (5VA) w10: v1(4039.76,1570.94) 4754.33,856.38 C1.P
NetC2_P: C2.P U.9 | length 1243.3
  Top Layer (GND) w10: v1(3979.76,1625.94) 3985.08,1620.63 4143.7,1620.63 U.9 ; v1(4599.84,1261.38) 4767.99,1261.38 4782.99,1276.38 C2.P
  Bottom Layer (5VA) w10: v1(3979.76,1625.94) 4092.42,1625.94 4142.42,1675.94 4244.26,1675.94 4365.12,1555.09 4365.12,1446.09 4549.83,1261.38 v1(4599.84,1261.38)
NetC3_1: C3.1 C6.1 R3.2 R7.2 R9.2 R11.2 | length 2647.6
  Top Layer (GND) w10: R9.2 2945.39,1581.93 C6.1 ; R3.2@3209.84,1581.93 3223.78,1581.93 3239.37,1566.34 3239.37,1552.4 3304.8,1486.97 3304.8,1476.97 R7.2 3279.84,1456.38 v1(3219.84,1396.38) ; v1(3694.84,1051.38) 4101.15,1051.38 4228.2,1178.42 4401.34,1178.42 4565.7,1342.79 4565.7,1346.72 4735.91,1516.93 C3.1
  Top Layer (GND) w15: C6.1 R3.2@3209.84,1581.93
  Top Layer (GND) w20: R11.2 2738.78,1586.93 2741.55,1584.15 2942.07,1584.15 R9.2
  Bottom Layer (5VA) w10: v1(3219.84,1396.38) 3340,1396.38 3685,1051.38 v1(3694.84,1051.38)
NetC3_2: C3.2 U.20 | length 399.8
  Top Layer (GND) w10: U.20 4441.88,1617.56 4460.27,1635.94 4529.33,1635.94 v1(4534.76,1641.38) ; v1@4534.76,1640.94 4589.88,1585.83 C3.2
NetC4_1: C4.1 U.12 | length 353.5
  Top Layer (GND) w10: C4.1 3869.29,1642.44 3972.11,1539.62 3972.11,1523.6 v1(3979.76,1515.94) 4043.31,1515.94 4068.15,1540.79 U.12
NetC4_2: C4.2 R4.1 | length 138.2
  Top Layer (GND) w20: R4.1 3666.79,1643.88 3797.89,1643.88 C4.2
NetC5_N: C5.N R5.1 | length 553.5
  Top Layer (GND) w10: R5.1 4313.78,455.83 4334.37,435.24 4334.37,431.66 4405.31,360.72 4405.31,357.2 4411.17,351.34 4557.02,351.34 4627.06,421.38 C5.N
  Top Layer (GND) w15: R5.1@4331.87,473.92 R5.1@4331.87,477.85
NetC6_2: C6.2 U.19 | length 1928.4
  Top Layer (GND) w10: v1(3009.84,1726.38) 3017.5,1718.72 3017.5,1694.24 3060.91,1650.83 C6.2 ; v1(3984.84,1346.38) 4209.84,1346.38 4259.84,1396.38 4273.27,1396.38 4298.27,1421.38 v1(4304.84,1421.38) ; v1(4300.33,1551.38) 4305.82,1551.38 4338.89,1584.45 4342.4,1584.45 4349.92,1591.97 U.19 U.19@4373.27,1591.46
  Bottom Layer (5VA) w10: v1(3009.84,1726.38) 3009.84,1517.24 3015.7,1511.38 3589.84,1511.38 3754.84,1346.38 v1(3984.84,1346.38) ; v1(4300.33,1551.38) 4302.59,1549.12 4302.59,1423.63 v1(4304.84,1421.38)
NetC7_1: C7.1 U.13 | length 1250.1
  Top Layer (GND) w10: C7.1 3345.39,650.32 3434.84,739.76 3473.23,739.76 v1(3474.84,741.38) ; v1(4050.1,1445.61) 4057.76,1453.26 4057.76,1472.09 4100.87,1515.2 U.13
  Bottom Layer (5VA) w10: v1(3474.84,741.38) 3478.13,744.66 3478.13,774.66 4050.1,1346.64 v1(4050.1,1445.61)
NetC7_2: C7.2 R8.1 | length 155.2
  Top Layer (GND) w20: C7.2 3419.29,641.38 3560.39,641.38 R8.1
NetC8_2: C8.2 C9.P U.16 | length 1865.3
  Top Layer (GND) w10: C8.2 3239.29,655.32 3723.78,1139.8 C9.P 4168.37,1139.8 4293.56,1265 4403.12,1265 4534.76,1396.65 4534.76,1465.94 v1(4534.76,1470.94) 4529.76,1465.94 4449.76,1465.94 4408.03,1507.68 4403.11,1507.68 4395.59,1515.2 U.16
NetC10_1: C10.1 U.25 Y1.2 | length 798.1
  Top Layer (GND) w10: U.25 4418.66,1745.51 4429.76,1756.61 4429.76,1775.44 4455.27,1800.94 v1(4534.76,1800.94) 4535.06,1800.65 4914.55,1800.65 Y1.2 4914.84,1789.21 4897.34,1771.71 C10.1
NetC11_1: C11.1 U.26 Y1.1 | length 1001.8
  Top Layer (GND) w10: U.26 4395.59,1771.1 4403.11,1778.62 4406.62,1778.62 4464.76,1836.76 v1(4464.76,1840.94) 4833.38,1840.94 Y1.1 5054.84,1782.4 C11.1
NetC25_1: C25.1 R17.1 R19.2 R19.3 | length 549.5
  Top Layer (GND) w30: R17.1 1207.5,491.95 1207.5,673.05 C25.1 1364.45,675.55 R19.2 R19.3
NetC28_N: C28.N R20.1 | length 438.6
  Top Layer (GND) w10: R20.1 193.98,2399.45 C28.N
NetC33_2: C33.2 R24.1 | length 133.2
  Top Layer (GND) w30: C33.2 1226.95,1497.5 1353.05,1497.5 R24.1
NetC34_2: C34.2 R24.2 R25.1 | length 207.7
  Top Layer (GND) w30: R25.1 1345.55,1600.47 1413.86,1532.17 1413.86,1510.59 R24.2
NetP9_3: P9.3 R16.2 | length 410.6
  Top Layer (GND) w30: R16.2 P9.3
NetP10_3: P10.3 R20.2 | length 199.7
  Top Layer (GND) w30: R20.2 80,2325.55 80,2140 P10.3
NetR4_2: R4.2 R12.2 | length 126.1
  Top Layer (GND) w20: R12.2 R4.2
NetR5_2: R5.2 U.18 | length 2019
  Top Layer (GND) w10: v1(4209.84,421.38) 4244.29,386.93 R5.2 ; U.18 4439.83,1566.38 4450.27,1555.94 4479.39,1555.94 4494.76,1571.32 4534.71,1571.32 v1(4534.76,1571.38)
  Bottom Layer (5VA) w10: v1(4209.84,421.38) 4438.67,650.2 4663.67,650.2 4880.7,867.24 4880.7,1030.02 4499.76,1410.95 4499.76,1485.44 4530.27,1515.94 4530.27,1566.88 v1(4534.76,1571.38)
NetR6_1: R6.1 U.17 | length 2119.3
  Top Layer (GND) w10: R6.1 4365.39,205.32 4451.46,291.38 v1(4574.84,291.38) ; U.17 4429.92,1540.79 v1(4464.76,1505.94)
  Bottom Layer (5VA) w10: v1(4464.76,1505.94) 4499.76,1540.94 4499.76,1585.88 4520.27,1606.38 4549.26,1606.38 4614.84,1540.8 4614.84,1536.38 4919.84,1231.38 4919.84,776.38 4574.84,431.38 v1(4574.84,291.38)
NetR18_1: R18.1 R19.1 | length 870.8
  Top Layer (GND) w10: R18.1 1046.83,450 1111.87,384.96 1372.51,384.96 1473.62,486.07 1473.62,666.38 R19.1
Pitch: P11.2 U3.43 | length 590.8
  Top Layer (GND) w10: P11.2 3535.27,2125.95 3579.37,2125.95 3633.94,2071.38 3791.13,2071.38 3989.79,2270.04 3992.11,2270.04 3995.89,2273.82 U3.43@4019.02,2273.82
RightHP_Out: C1.N P14.2 R2.1 | length 1717.7
  Top Layer (GND) w10: R2.1 4448.78,386.93 4918.23,856.38 C1.N 4984.84,1219.22 5168.71,1403.09 5168.71,1478.68 5329.84,1639.81 5329.84,1648.41 5354.84,1673.41 P14.2
SCL_LCD: P6.4 U3.160 | length 335.9
  Top Layer (GND) w10: U3.160@4411.73,3178.35 4411.73,3308.27 v1(4439.84,3336.38) 4447.34,3343.88 4447.34,3488.88 P6.4
SCLK: P2.4 P5.6 U3.96 | length 4696.2
  Top Layer (GND) w10: U3.96@5020.98,2391.93 5122.46,2391.93 5143.01,2371.38 v1(5234.84,2371.38) 5314.84,2371.38 5357.34,2413.88 P5.6@5359.84,2416.38 ; P5.6 5360.53,2410.69 5489.31,2410.69 v1(5490,2410)
  Bottom Layer (5VA) w10: P2.4 2165,2625 2505,2625 3050,3170 4802.94,3170 5301.09,2671.85 5376.48,2671.85 5515,2533.33 5515,2435 v1(5490,2410)
SDA_LCD: P6.3 U3.161 | length 333.4
  Top Layer (GND) w10: P6.3 4359.84,3491.38 4359.84,3341.38 v1(4364.84,3336.38) 4392.05,3309.17 U3.161@4392.05,3178.35
SPICLKA: P5.4 U3.101 U.24 | length 1564.1
  Top Layer (GND) w10: U.24 4423.74,1719.92 v1(4464.76,1760.94) ; U3.101@5020.98,2490.35 5021.33,2490.01 5066.21,2490.01 v1(5104.84,2451.38) 5188.39,2451.38 5353.39,2616.38 P5.4@5359.84,2616.38
  Bottom Layer (5VA) w10: v1(4464.76,1760.94) 4499.76,1795.94 4499.76,1825.4 4699.37,2025.01 4699.37,2036.81 4743.47,2080.91 4873.51,2080.91 5104.84,2312.24 v1(5104.84,2451.38)
SPISIMOA: P5.2 U3.103 U.23 | length 1785.8
  Top Layer (GND) w10: U.23 4438.65,1694.33 4465.27,1720.94 v1(4534.76,1720.94) ; U3.103@5020.98,2529.72 5021.33,2530.07 5063.54,2530.07 v1(5104.84,2571.38) 5109.84,2571.38 5354.84,2816.38 P5.2@5359.84,2816.38
  Bottom Layer (5VA) w10: v1(4534.76,1720.94) 4690.62,1876.8 4751.17,1876.8 4920.31,2045.95 4920.31,2106.5 5134.84,2321.02 5134.84,2425.88 5144.84,2435.88 5144.84,2460.88 5109.34,2496.38 5109.34,2566.88 v1(5104.84,2571.38)
SPISTEA: P5.3 U3.102 U.21 | length 1929.3
  Top Layer (GND) w10: U.21 4435.99,1643.15 4463.79,1670.94 v1(4464.76,1670.94) ; U3.102@5020.98,2510.04 5021.33,2510.39 5153.85,2510.39 v1(5154.84,2511.38) P5.3@5359.84,2716.38
  Bottom Layer (5VA) w10: v1(4464.76,1670.94) 4470.2,1676.38 4734.84,1676.38 5299.84,2241.38 5299.84,2366.38 v1(5154.84,2511.38)
TCK: P8.5 U3.81 | length 225.2
  Top Layer (GND) w10: U3.81@4805.43,2176.38 4805.43,2153.25 4809.21,2149.47 4809.21,2147.15 4857.41,2098.96 4902.26,2098.96 P8.5
TDI: P8.1 U3.77 | length 238.6
  Top Layer (GND) w10: P8.1 4624.99,2106.53 4683.82,2106.53 4722.91,2145.62 4722.91,2149.47 4726.69,2153.25 U3.77@4726.69,2176.38
TDO: P8.2 U3.78 | length 170.8
  Top Layer (GND) w10: P8.2 4746.38,2127.91 U3.78@4746.38,2176.38
THEREMIN_OUT: P3.2 P4.3 P10.2 R3.1 | length 5499.8
  Top Layer (GND) w10: v1(2604.84,2166.38) 2615.67,2166.38 2635.67,2146.38 2649.84,2146.38 3140.39,1655.83 R3.1
  Top Layer (GND) w30: P10.2 90,2035 175,2120 v2(180,2120)
  Bottom Layer (5VA) w10: P3.2 1568.62,2166.38 v1(2604.84,2166.38) 2305,1866.54 P4.3
  Bottom Layer (5VA) w15: v2(180,2120) 892.66,2120 1073.27,2300.61 1232.04,2459.38 1232.04,2465.12 1245,2478.08 P3.2
TMS: P8.4 U3.80 | length 165.7
  Top Layer (GND) w10: U3.80@4785.75,2176.38 4785.75,2115.47 P8.4
TRST_N: P8.3 U3.79 | length 137.6
  Top Layer (GND) w10: P8.3 4765.72,2047.25 4765.72,2176.03 U3.79@4766.06,2176.38
VCC2: C26.P P9.2 U2.14 | length 2260
  Top Layer (GND) w30: v2(175,2890) 175,2895.41 185,2905.41 P9.2 ; U2.14 195,1827.1 463.62,2095.72 463.62,2307.34 420,2350.97 C26.P
  Bottom Layer (5VA) w15: v2(175,2890) 175,2756.57 C26.P
VDDA: C14.P C17.2 C18.2 C20.2 C21.2 C22.2 P2.2 U3.3 U3.11 U3.15 U3.20 U3.26 U3.36 U3.54 U3.62 U3.68 U3.72 U3.75 U3.82 U3.88 U3.91 U3.99 U3.106 U3.114 U3.116 U3.119 U3.120 U3.125 U3.127 U3.138 U3.147 U3.152 U3.159 U3.168 U.1 U.22 U.27 | length 7980.7
  Top Layer (GND) w10: U3.3@4018.94,3061.3 4019.02,3061.22 4042.14,3061.22 4045.92,3057.44 4048.24,3057.44 4057.56,3048.12 4057.56,2916.84 ; U3.36@4019.02,2411.61 4042.14,2411.61 4067.12,2411.61 ; U3.26@4019.02,2608.46 U3.26 U3.26 4083.54,2608.54 v1(4085,2610) ; U3.20@4019.02,2726.57 U3.20 4042.14,2726.57 4045.92,2730.35 4048.24,2730.35 4057.56,2739.67 ; U3.15@4019.02,2825 U3.15 4042.14,2825 4045.92,2828.78 4048.24,2828.78 4057.56,2838.1 ; U3.11@4019.02,2903.74 4042.14,2903.74 4045.92,2907.52 4048.24,2907.52 4057.56,2916.84 ; U3.36 4067.12,2411.61 ; 4057.56,2842.35 4057.56,2916.84 ; v1(4100,2725) 4092.35,2732.65 4064.58,2732.65 4057.56,2739.67 ; v1(4115,2475) 4109.5,2469.5 4109.5,2425 ; U.1 4188.43,1822.28 v1(4254.76,1755.94) ; v1(4170,3055) 4100,2985 v1(4100,2850) 4092.35,2842.35 4061.81,2842.35 4057.56,2838.1 ; C18.2 4248.78,705.83 4269.37,726.42 4269.37,890.03 4374.84,995.5 C14.P ; U3.168@4254.25,3178.35 4254.25,3155.22 4258.03,3151.44 4258.03,3149.12 4267.35,3139.8 ; U3.54@4273.94,2176.38 4273.94,2199.51 4273.94,2260.56 ; U3.54 4273.94,2260.56 ; v1(4280,3090) 4277.15,3092.85 4277.15,3130 4267.35,3139.8 ; U.22@4369.68,1671.81 U.22 4349.92,1668.74 4342.4,1676.26 4334.45,1676.26 v1(4254.76,1755.94) ; U.27 4295.51,1796.69 v1(4254.76,1755.94) ; U3.159@4431.42,3178.35 4431.42,3155.22 4427.64,3151.44 4427.64,3149.12 4418.32,3139.8 4267.35,3139.8 ; U3.62@4431.5,2199.92 4431.5,2215.28 4432.59,2216.38 4534.97,2216.38 ; v1(4535,3085) 4535,3092.49 4582.31,3139.8 ; U3.68@4549.53,2176.38 4549.53,2199.51 4545.75,2203.29 4545.75,2205.6 4534.97,2216.38 ; U3.152 4569.21,3155.22 4572.99,3151.44 4572.99,3149.12 4582.31,3139.8 ; v1(4580,2275) 4534.97,2229.97 4534.97,2216.38 ; U3.72@4628.27,2176.38 4628.27,2199.51 4628.27,2413.27 ; U3.72 4628.27,2413.27 ; U3.147@4667.64,3178.35 4667.29,3178 4667.29,3152.55 4654.54,3139.8 ; v1(4675,2275) 4672.77,2272.77 4672.77,2216.38 ; U3.75@4687.32,2176.38 4687.32,2199.51 4683.54,2203.29 4683.54,2205.6 4672.77,2216.38 ; U3.82@4825.12,2176.38 4825.12,2199.51 4821.34,2203.29 4821.34,2205.6 4810.56,2216.38 ; U3.138@4844.8,3178.35 4844.8,3155.22 4841.02,3151.44 4841.02,3149.12 4831.71,3139.8 ; v1(4850,2930) 4921.16,3001.16 4965.15,3001.16 ; U3.88@4943.23,2176.38 4943.23,2199.51 4939.45,2203.29 4939.45,2205.6 4928.67,2216.38 ; v1(4945,2825) 4979.84,2790.16 4979.84,2769.93 ; U3.127@4997.44,3002.09 4995.35,3000 4966.31,3000 4965.15,3001.16 ; U3.119@4997.86,2844.69 U3.119@5020.98,2844.69 ; U3.91@5020.98,2293.5 4997.86,2293.5 4994.08,2289.72 4991.76,2289.72 4979.84,2277.81 ; U3.99@5020.98,2450.98 4997.86,2450.98 4994.08,2447.2 4991.76,2447.2 4979.84,2435.29 ; U3.106@5020.98,2588.78 4997.86,2588.78 4994.08,2585 4991.76,2585 4979.84,2573.08 ; U3.114@5020.98,2746.26 4997.86,2746.26 4994.08,2742.48 4991.76,2742.48 4979.84,2730.56 ; U3.116@5020.98,2785.63 4997.86,2785.63 4994.08,2781.85 4991.76,2781.85 4979.84,2769.93 ; U3.120@5020.98,2864.37 4998.35,2864.37 U3.120 4955.63,2864.37 4894.14,2925.86 ; U3.125@5020.98,2962.8 4922.8,2962.8 4894.14,2934.14 4894.14,2925.86 ; 4057.56,2739.67 4057.56,2838.1 ; 4057.56,2838.1 4057.56,2916.84 ; 4067.12,2411.61 4080.5,2425 4109.5,2425 ; 4109.5,2425 4273.94,2260.56 ; 4582.31,3139.8 4654.54,3139.8 ; 4628.27,2413.27 4850,2635 4894.14,2679.14 4894.14,2925.86 ; 4654.54,3139.8 4831.71,3139.8 ; 4672.77,2216.38 4810.56,2216.38 ; 4810.56,2216.38 4928.67,2216.38 ; 4831.71,3139.8 4844.32,3127.19 4950.46,3127.19 4965.15,3112.5 4965.15,3001.16 ; 4928.67,2216.38 4946.27,2233.97 4956.89,2233.97 4974.49,2251.56 4974.49,2272.45 4979.84,2277.81 ; 4979.84,2277.81 4979.84,2435.29 ; 4979.84,2435.29 4979.84,2573.08 ; 4979.84,2573.08 4979.84,2730.56 ; 4979.84,2730.56 4979.84,2769.93
  Top Layer (GND) w15: C17.2 4009.84,705.83 C18.2
  Bottom Layer (5VA) w10: v1(4085,2610) 4092.5,2617.5 4092.5,2717.5 v1(4100,2725) ; v1(4100,2850) 4190.55,2850 C22.2 ; v1(4115,2475) 4150,2440 C20.2 ; v1(4170,3055) 4245,3055 v1(4280,3090) 4282.5,3087.5 4532.5,3087.5 v1(4535,3085) ; v1(4580,2275) v1(4675,2275) ; C21.2 4789.45,2676.06 4810.04,2655.47 4813.98,2655.47 4826.79,2642.65 4852.35,2642.65 v1(4860,2635) ; v1(4850,2930) 4850,2925 4945,2830 v1(4945,2825)
Volume: P12.2 U3.42 | length 759.7
  Top Layer (GND) w10: P12.2 3529.84,2326.32 3495.31,2291.79 3495.31,2210.91 3509.84,2196.38 3804.99,2196.38 3902.12,2293.5 U3.42@4019.02,2293.5
XRS_N: P2.9 U3.124 | length 3611.4
  Top Layer (GND) w10: P2.9 2792.54,2752.54 2792.54,2992.54 3246.99,3446.99 4261.35,3446.99 4299.91,3485.55 4299.91,3497.35 4338.47,3535.91 4569.09,3535.91 4841.61,3263.39 4956.61,3263.39 5125,3095 5125,3015 5053.11,2943.11 U3.124
pads on no net: U2.6 U2.9 U2.10 U2.11 U2.12 U2.13 U3.1 U3.2 U3.4 U3.5 U3.6 U3.7 U3.13 U3.14 U3.18 U3.19 U3.22 U3.23 U3.29 U3.30 U3.31 U3.32 U3.35 U3.38 U3.39 U3.40 U3.44 U3.45 U3.46 U3.47 U3.48 U3.49 U3.50 U3.51 U3.53 U3.55 U3.56 U3.57 U3.58 U3.59 U3.60 U3.63 U3.64 U3.65 U3.66 U3.67 U3.69 U3.70 U3.71 U3.73 U3.74 U3.83 U3.84 U3.85 U3.86 U3.87 U3.89 U3.90 U3.92 U3.93 U3.98 U3.100 U3.104 U3.105 U3.108 U3.109 U3.110 U3.111 U3.112 U3.113 U3.115 U3.118 U3.121 U3.128 U3.129 U3.130 U3.131 U3.132 U3.133 U3.134 U3.135 U3.136 U3.139 U3.140 U3.141 U3.142 U3.143 U3.144 U3.145 U3.146 U3.148 U3.149 U3.150 U3.151 U3.154 U3.155 U3.156 U3.157 U3.162 U3.163 U3.164 U3.165 U3.166 U3.167 U3.170 U3.171 U3.172 U3.173 U3.174 U3.175 U3.176 U.2
copper on no net: | length 7.1
  Top Layer (GND) w10: 4385,2755 4390,2760

## Polygon pours and split planes (outlines as drawn)
5VD on Bottom Layer (5VA) "5VD" (hatched 45Degree grid 20 track 8, pour order 1): 0,-5 0,3595 5600,3595 5600,-5
GND on Top Layer (GND) "GND" (hatched 45Degree grid 20 track 8, pour order 0): 0,3595 5600,3595 5600,-5 15,-5 5,5 0,0
5VA on Layer 1 (Supplies) (split plane): 1594.9,3297.89 1594.9,2340 1595.29,2338.05 1596.4,2336.4 1598.05,2335.29 1600,2334.9 2669.74,2334.9 2669.74,1266.38 2670.13,1264.43 2671.24,1262.77 2672.89,1261.67 2674.84,1261.28 2759.84,1261.28 2761.79,1261.67 2762.39,1262.07 2762.99,1261.67 2764.94,1261.28 3199.84,1261.28 3201.79,1261.67 3203.45,1262.77 3204.55,1264.43 3204.94,1266.38 3204.94,1966.38 3204.94,2516.28 3819.74,2516.28 3819.74,1966.38 3819.74,1266.38 3820.13,1264.43 3821.24,1262.77 3822.89,1261.67 3824.84,1261.28 4154.74,1261.28 4154.74,821.48 2674.84,821.48 2672.89,821.09 2671.24,819.98 2670.13,818.33 2669.74,816.38 2669.74,110.83 1055.45,110.83 1055.35,111.31 1054.25,112.96 1052.59,114.07 1050.64,114.45 20.1,114.45 20.1,3314.9 1577.89,3314.9
VDDA on Layer 1 (Supplies) (split plane): 5579.9,15.1 20.1,15.1 20.1,104.26 1049.46,104.26 1049.56,103.78 1050.66,102.13 1052.31,101.02 1054.27,100.64 2674.84,100.64 2676.79,101.02 2678.45,102.13 2679.55,103.78 2679.94,105.73 2679.94,811.28 4159.84,811.28 4161.79,811.67 4163.45,812.77 4164.55,814.43 4164.94,816.38 4164.94,1266.38 4164.55,1268.33 4163.45,1269.98 4161.79,1271.09 4159.84,1271.48 3829.94,1271.48 3829.94,1966.38 3829.94,2521.38 3829.55,2523.33 3828.45,2524.98 3826.79,2526.09 3824.84,2526.48 3199.84,2526.48 3197.89,2526.09 3196.24,2524.98 3195.13,2523.33 3194.74,2521.38 3194.74,1966.38 3194.74,1271.48 2764.94,1271.48 2762.99,1271.09 2762.39,1270.69 2761.79,1271.09 2759.84,1271.48 2679.94,1271.48 2679.94,2339.84 2679.55,2341.79 2678.45,2343.45 2678.29,2343.6 2676.64,2344.71 2674.68,2345.1 1605.1,2345.1 1605.1,3300 1604.71,3301.95 1603.6,3303.6 1583.6,3323.6 1581.95,3324.71 1580,3325.1 20.1,3325.1 20.1,3574.9 5579.9,3574.9
AGND on Layer 2 (GNDs) (split plane): 1594.9,3297.89 1594.9,2340 1595.29,2338.05 1596.4,2336.4 1598.05,2335.29 1600,2334.9 2666.7,2334.9 2666.7,1284.43 2667.08,1282.48 2668.19,1280.82 2669.84,1279.72 2671.79,1279.33 3192.89,1279.33 3194.84,1279.72 3196.5,1280.82 3203.45,1287.77 3204.55,1289.43 3204.94,1291.38 3204.94,1966.38 3204.94,2516.28 3819.74,2516.28 3819.74,1966.38 3819.74,1281.38 3820.13,1279.43 3821.24,1277.77 3822.89,1276.67 3824.84,1276.28 3826.79,1276.67 3828.45,1277.77 3831.95,1281.28 4119.74,1281.28 4119.74,771.48 2674.84,771.48 2672.89,771.09 2671.24,769.98 2670.13,768.33 2669.74,766.38 2669.74,111.48 20.1,111.48 20.1,3301.3 1591.49,3301.3